# Altium PCB PCB1.PcbDoc
Units mil, origin at the board's own origin, x right, y up, seen from the top; angles counter-clockwise.
Board outline 3655 x 2655 mil, 2 copper layers (Top Layer, Bottom Layer); 40 components, 11 nets, 89 pads, 0 vias.
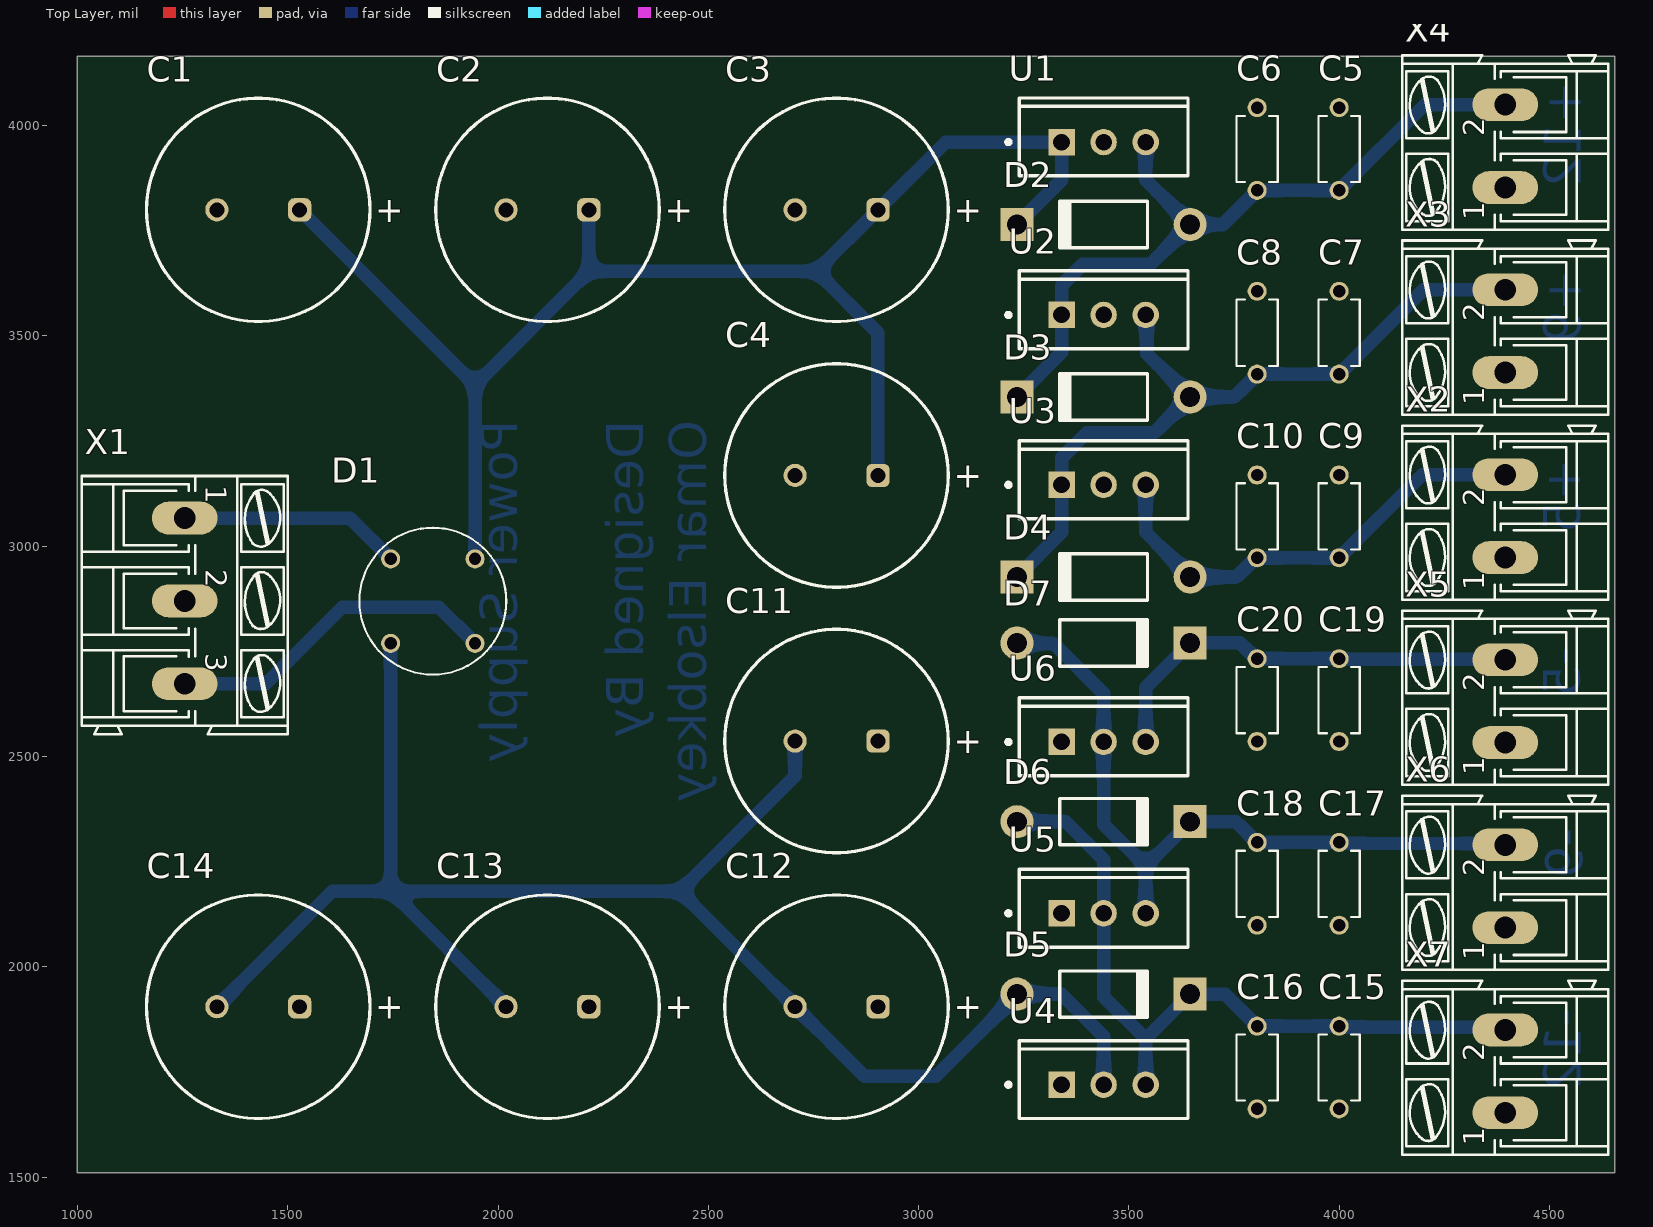
[diagram p0: Top Layer view]
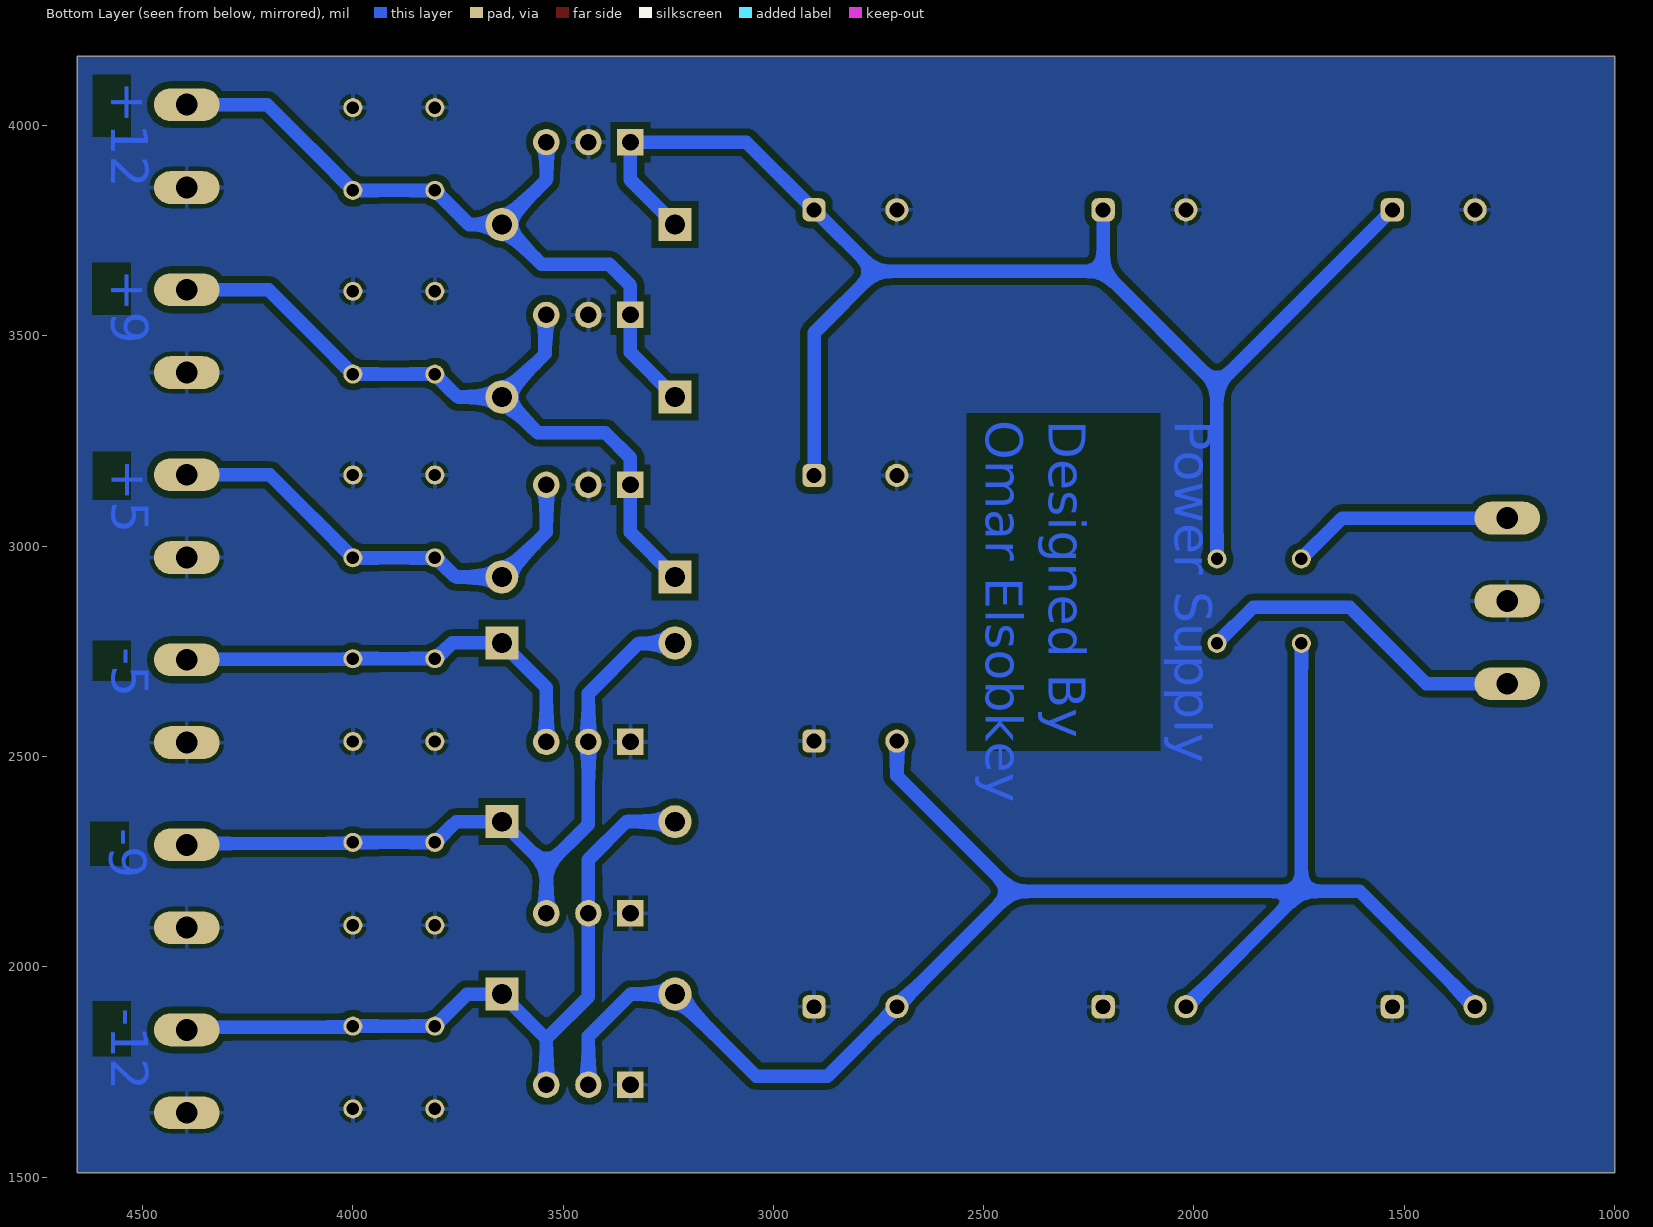
[diagram p1: Bottom Layer view, seen from below]
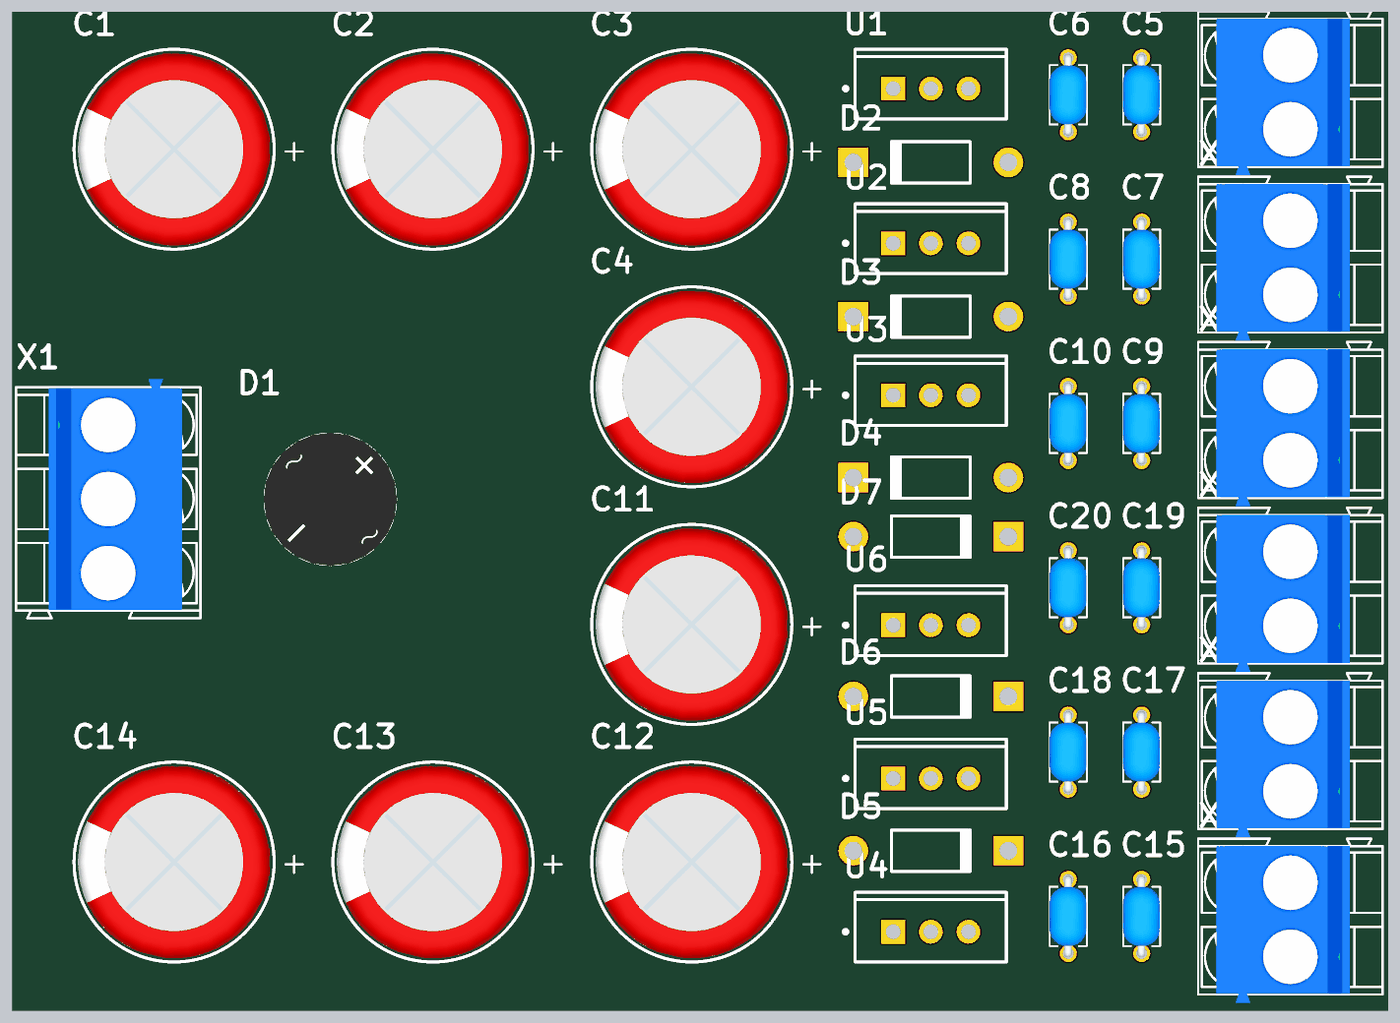
[diagram p2: 3D render of the assembled board from above, using the file's embedded part models]

## Layer stack, top to bottom
Top Solder: solder mask 0.4, Solder Resist, Dk 3.5
Top Layer: signal copper 1.4
Dielectric 1: dielectric 12.6, FR-4, Dk 4.8
Bottom Layer: signal copper 1.4
Bottom Solder: solder mask 0.4, Solder Resist, Dk 3.5

## Board outline
1000,1510 4655,1510 4655,4165 1000,4165

## Design rules (kind name [scope] priority, off if disabled: settings)
Clearance B_GND [InNamedPolygon('B_GND')] p1: gap=16 ignorepadtopadclearanceinfootprint=FALSE
Clearance [All] p2: gap=16 ignorepadtopadclearanceinfootprint=FALSE
PolygonConnect [All] p1: connectstyle=Relief reliefconductorwidth=10 reliefentries=4 polygonreliefangle="90 Angle" airgapwidth=10
RoutingVias [All] p1: holewidth=28 width=50 viastyle="Through Hole" minholewidth=28 minwidth=50 maxholewidth=28 maxwidth=50
SolderMaskExpansion [All] p1: expansion=4 istentingtop=FALSE
UnRoutedNet [All] p1: checkbadconnections=TRUE
Width [All] p1: maxlimit=32 minlimit=32 preferedwidth=32
29 further rules are at their usual default settings.

## Components (designator, comment, footprint, x,y, rotation, side; value= is the part's Value field where it differs from the comment)
C1 "1000uF, 50V" WCAP-ATG8_D13H25 1430,3800 r0 top
C2 "1000uF, 50V" WCAP-ATG8_D13H25 2117.5,3800 r0 top
C3 "1000uF, 50V" WCAP-ATG8_D13H25 2805,3800 r0 top
C4 "1000uF, 50V" WCAP-ATG8_D13H25 2805,3168.33 r0 top
C5 "RDE5C2A220J0M1H03A" CAP_RDE5C2A220J0M1H03A 4000,3944.62 r270 top
C6 "RDE5C2A220J0M1H03A" CAP_RDE5C2A220J0M1H03A 3805,3944.62 r270 top
C7 "RDE5C2A220J0M1H03A" CAP_RDE5C2A220J0M1H03A 4000,3507.77 r270 top
C8 "RDE5C2A220J0M1H03A" CAP_RDE5C2A220J0M1H03A 3805,3507.77 r270 top
C9 "RDE5C2A220J0M1H03A" CAP_RDE5C2A220J0M1H03A 4000,3070.92 r270 top
C10 "RDE5C2A220J0M1H03A" CAP_RDE5C2A220J0M1H03A 3805,3070.92 r270 top
C11 "1000uF, 50V" WCAP-ATG8_D13H25 2805,2536.67 r0 top
C12 "1000uF, 50V" WCAP-ATG8_D13H25 2805,1905 r0 top
C13 "1000uF, 50V" WCAP-ATG8_D13H25 2117.5,1905 r0 top
C14 "1000uF, 50V" WCAP-ATG8_D13H25 1430,1905 r0 top
C15 "RDE5C2A220J0M1H03A" CAP_RDE5C2A220J0M1H03A 4000,1760.38 r270 top
C16 "RDE5C2A220J0M1H03A" CAP_RDE5C2A220J0M1H03A 3805,1760.38 r270 top
C17 "RDE5C2A220J0M1H03A" CAP_RDE5C2A220J0M1H03A 4000,2197.23 r270 top
C18 "RDE5C2A220J0M1H03A" CAP_RDE5C2A220J0M1H03A 3805,2197.23 r270 top
C19 "RDE5C2A220J0M1H03A" CAP_RDE5C2A220J0M1H03A 4000,2634.08 r270 top
C20 "RDE5C2A220J0M1H03A" CAP_RDE5C2A220J0M1H03A 3805,2634.08 r270 top
D1 "2W10G" 2W10G 1845,2869.44 r0 top
D2 "Diode 1N4004" DO-41 3440,3765 r180 top
D3 "Diode 1N4004" DO-41 3440,3355 r180 top
D4 "Diode 1N4004" DO-41 3440,2926.98 r180 top
D5 "Diode 1N4004" DO-41 3440,1935 r0 top
D6 "Diode 1N4004" DO-41 3440,2345 r0 top
D7 "Diode 1N4004" DO-41 3440,2770 r0 top
U1 "LM7812CT" TO-220-P 3440,3961.02 r90 top
U2 "LM7809CT" TO-220-P 3440,3550 r90 top
U3 "LM7805CT" TO-220-P 3440,3145.95 r90 top
U4 "LM7912CT" TO-220-N 3440,1719.57 r90 top
U5 "LM7905CT" TO-220-N 3440,2127.1 r90 top
U6 "LM7909CT" TO-220-N 3440,2534.64 r90 top
X1 "AK300/3" AK300/3 1255,2870 r270 top
X2 "AK300/2" AK300/2 4395,3170 r90 top
X3 "AK300/2" AK300/2 4395,3610 r90 top
X4 "AK300/2" AK300/2 4395,4050 r90 top
X5 "AK300/2" AK300/2 4395,2730 r90 top
X6 "AK300/2" AK300/2 4395,2290 r90 top
X7 "AK300/2" AK300/2 4395,1850 r90 top

## Footprints (in the part's own frame and the unit in brackets; to place one, negate y for a bottom-side part, rotate by r counter-clockwise, add the part's x,y. Pads: shape width x height; smd on the part's side, far side on the other; paste and mask are expansions set on the pad)
2W10G [mm]
  round 1.15 hole 0.75: 1(-2.55,2.55) 2(2.55,2.55) 3(2.55,-2.55) 4(-2.55,-2.55)
  silkscreen extent -4.44,-4.44 4.44,4.44, body extent -6.36,-6.36 6.36,6.36, height 9.65
AK300/2 [mil]
  oval 78x156 hole 52: 1(-197,0) 2(0,0)
  silkscreen extent -297,-245 117,245, body extent -319,-157 98,197, height 496
AK300/3 [mil]
  oval 78x156 hole 52: 1(-197,0) 2(0,0) 3(197,0)
  silkscreen extent -297,-245 317,245, body extent -319,-157 295,197, height 496
CAP_RDE5C2A220J0M1H03A [mm]
  round 1.15 hole 0.75: 1(-2.5,0) 2(2.5,0)
  silkscreen extent -2,-1.25 2,1.25, body extent -2.75,-1.27 2.75,1.23, height 6
DO-41 [mm] "Diode, Axial; Body 5.2 x 2.7 mm (LxDia. max), Lead Dia. 0.86 mm (max)"
  round 2 hole 1.2: 1(-5.23,0)
  rect 2x2 hole 1.2: 2(5.23,0)
  silkscreen extent -2.65,-1.4 2.75,1.4
TO-220-N [mm] "FM, 3-Leads, Body 10.2x4.7mm, Pitch 2.54mm"
  round 1.6 hole 1: 1(0,0) 3(0,-2.54)
  rect 1.6x1.6 hole 1: 2(0,2.54)
  silkscreen extent -2.04,-5.1 2.66,5.87, body extent -2.04,-5.1 2.66,5.1, height 18.95
TO-220-P [mm] "FM, 3-Leads, Body 10.2x4.7mm, Pitch 2.54mm"
  rect 1.6x1.6 hole 1: 1(0,2.54)
  round 1.6 hole 1: 2(0,0) 3(0,-2.54)
  silkscreen extent -2.04,-5.1 2.66,5.87, body extent -2.04,-5.1 2.66,5.1, height 18.95
WCAP-ATG8_D13H25 [mm] "Aluminum Electrolytic Capacitors, 13x25mm"
  rrect50% 1.4x1.4 hole 0.9: 1(2.5,0)
  round 1.4 hole 0.9: 2(-2.5,0)
  silkscreen extent -6.75,-6.75 6.75,6.75, body extent -6.49,-6.5 6.5,6.5, height 25.31

## Part data
C1 C2 C3 C4 C11 C12 C13 C14: library part 860010678024, "WCAP-ATG8 Aluminum Electrolytic Capacitor, Radial, THT, D13xH25, 1000uF, 50V", Capacitance=1000uF, Capacitance Tolerance=+/-20%, Leakage Current=500uA, Manufacturer="Wurth Elektronik", Operating Temperature="-40 to +85degC", Rated Voltage=50VDC, Ripple Current=1485mA, ComponentLink1Description=Manufacturer, ComponentLink1URL=http://www.we-online.de, ComponentLink2Description=Datasheet, ComponentLink2URL=https://www.we-online.com/catalog/datasheet/860010678024.pdf, Diameter=13mm, Dissipation Factor=10%, Endurance=2000h, Height=25mm, Manufacturer Part Number=860010678024, Mounting Technology=THT, Packaging="Ammo Pack", Published Date="October 2020", Technical Reference=ATBI250102M050DSPACB000
C5 C6 C7 C8 C9 C10 C15 C16 C17 C18 C19 C20: "Lead Capacitor C0G_EIA_ with Capacitance: 22pF and Rated Voltage: 100Vdc", Package="Radial Murata", Availability=Unavailable, MF=Murata, MP=RDE5C2A220J0M1H03A, Price=None, SnapEDA_Link=https://www.snapeda.com/parts/RDE5C2A220J0M1H03A/Murata/view-part/4545539/?ref=snap
D2 D3 D4 D5 D6 D7: "1 Amp General Purpose Rectifier", Code_JEDEC=DO-204-AL, ComponentLink1Description="Manufacturer Link", ComponentLink1URL=http://www.fairchildsemi.com/, ComponentLink2Description=Datasheet, ComponentLink2URL=http://www.fairchildsemi.com/ds/1N%2F1N4001.pdf, DatasheetVersion=1998, LatestRevisionDate=17-Jul-2002, LatestRevisionNote="Re-released for DXP Platform.", PackageDescription="Diode, Axial; Body 5.2 x 2.7 mm (LxDia. max), Lead Dia. 0.86 mm (max)", PackageReference=DO-41, PackageVersion=Aug-1999, Published=8-Jun-2000, Publisher="Altium Limited"
U1: library part 7812, Manufacturer=FairchildSemiconductor, Maximum Input Voltage=35V, Maximum Output Current=2.2(Typ)A, Maximum Quiescent Current=8mA, Operating Temperature=-40to125degC, Output Voltage=5V, Package=3TO-220AB, Package Description="3-Pin Through Hole Device, Body 10 x 4.5 mm, Pitch 2.54 mm", Package Reference=TO-220, Typical Dropout Voltage @ Current=2@1AV, Accuracy=±4%, Category=LinearRegulator, Datasheet URL=https://datasheet.ciiva.com/26904/lm7805ct-26904988.pdf, Datasheet Version=Aug-12, Line Regulation=100mV, Load Regulation=100mV, Manufacturer URL=https://www.fairchildsemi.com/, Mounting=ThroughHole, Number of Outputs=1, Output Type=Fixed, Package URL=https://www.fairchildsemi.com/package-drawings/TO/TO220B03.pdf, Packaging=Rail/Tube, Polarity=Positive, Rad Hard=No, Type=Linear
U2: library part 7809, Manufacturer=FairchildSemiconductor, Maximum Input Voltage=35V, Maximum Output Current=2.2(Typ)A, Maximum Quiescent Current=8mA, Operating Temperature=-40to125degC, Output Voltage=5V, Package=3TO-220AB, Package Description="3-Pin Through Hole Device, Body 10 x 4.5 mm, Pitch 2.54 mm", Package Reference=TO-220, Typical Dropout Voltage @ Current=2@1AV, Accuracy=±4%, Category=LinearRegulator, Datasheet URL=https://datasheet.ciiva.com/26904/lm7805ct-26904988.pdf, Datasheet Version=Aug-12, Line Regulation=100mV, Load Regulation=100mV, Manufacturer URL=https://www.fairchildsemi.com/, Mounting=ThroughHole, Number of Outputs=1, Output Type=Fixed, Package URL=https://www.fairchildsemi.com/package-drawings/TO/TO220B03.pdf, Packaging=Rail/Tube, Polarity=Positive, Rad Hard=No, Type=Linear
U3: library part 7805, "Positive Voltage Regulator, 5 V, 1 A, -40 to 125 degC, 3-Pin TO-220, RoHS, Tube", Manufacturer=FairchildSemiconductor, Maximum Input Voltage=35V, Maximum Output Current=2.2(Typ)A, Maximum Quiescent Current=8mA, Operating Temperature=-40to125degC, Output Voltage=5V, Package=3TO-220AB, Package Description="3-Pin Through Hole Device, Body 10 x 4.5 mm, Pitch 2.54 mm", Package Reference=TO-220, Typical Dropout Voltage @ Current=2@1AV, Accuracy=±4%, Category=LinearRegulator, Datasheet URL=https://datasheet.ciiva.com/26904/lm7805ct-26904988.pdf, Datasheet Version=Aug-12, Line Regulation=100mV, Load Regulation=100mV, Manufacturer URL=https://www.fairchildsemi.com/, Mounting=ThroughHole, Number of Outputs=1, Output Type=Fixed, Package URL=https://www.fairchildsemi.com/package-drawings/TO/TO220B03.pdf, Packaging=Rail/Tube, Polarity=Positive, Rad Hard=No, Type=Linear
U4: library part 7912, Manufacturer=FairchildSemiconductor, Maximum Input Voltage=35V, Maximum Output Current=2.2(Typ)A, Maximum Quiescent Current=8mA, Operating Temperature=-40to125degC, Output Voltage=5V, Package=3TO-220AB, Package Description="3-Pin Through Hole Device, Body 10 x 4.5 mm, Pitch 2.54 mm", Package Reference=TO-220, Typical Dropout Voltage @ Current=2@1AV, Accuracy=±4%, Category=LinearRegulator, Datasheet URL=https://datasheet.ciiva.com/26904/lm7805ct-26904988.pdf, Datasheet Version=Aug-12, Line Regulation=100mV, Load Regulation=100mV, Manufacturer URL=https://www.fairchildsemi.com/, Mounting=ThroughHole, Number of Outputs=1, Output Type=Fixed, Package URL=https://www.fairchildsemi.com/package-drawings/TO/TO220B03.pdf, Packaging=Rail/Tube, Polarity=Positive, Rad Hard=No, Type=Linear
U5: library part 7905, "Negative Voltage Regulator, 5 V, 1 A, -40 to 125 degC, 3-Pin TO-220, RoHS, Tube", Manufacturer=FairchildSemiconductor, Maximum Input Voltage=35V, Maximum Output Current=2.2(Typ)A, Maximum Quiescent Current=8mA, Operating Temperature=-40to125degC, Output Voltage=5V, Package=3TO-220AB, Package Description="3-Pin Through Hole Device, Body 10 x 4.5 mm, Pitch 2.54 mm", Package Reference=TO-220, Typical Dropout Voltage @ Current=2@1AV, Accuracy=±4%, Category=LinearRegulator, Datasheet URL=https://datasheet.ciiva.com/26904/lm7805ct-26904988.pdf, Datasheet Version=Aug-12, Line Regulation=100mV, Load Regulation=100mV, Manufacturer URL=https://www.fairchildsemi.com/, Mounting=ThroughHole, Number of Outputs=1, Output Type=Fixed, Package URL=https://www.fairchildsemi.com/package-drawings/TO/TO220B03.pdf, Packaging=Rail/Tube, Polarity=Positive, Rad Hard=No, Type=Linear
U6: library part 7909, Manufacturer=FairchildSemiconductor, Maximum Input Voltage=35V, Maximum Output Current=2.2(Typ)A, Maximum Quiescent Current=8mA, Operating Temperature=-40to125degC, Output Voltage=5V, Package=3TO-220AB, Package Description="3-Pin Through Hole Device, Body 10 x 4.5 mm, Pitch 2.54 mm", Package Reference=TO-220, Typical Dropout Voltage @ Current=2@1AV, Accuracy=±4%, Category=LinearRegulator, Datasheet URL=https://datasheet.ciiva.com/26904/lm7805ct-26904988.pdf, Datasheet Version=Aug-12, Line Regulation=100mV, Load Regulation=100mV, Manufacturer URL=https://www.fairchildsemi.com/, Mounting=ThroughHole, Number of Outputs=1, Output Type=Fixed, Package URL=https://www.fairchildsemi.com/package-drawings/TO/TO220B03.pdf, Packaging=Rail/Tube, Polarity=Positive, Rad Hard=No, Type=Linear
X1 X2 X3 X4 X5 X6 X7: Package=None, Availability=Unavailable, Check_prices=https://www.snapeda.com/parts/AK300/3/Altech/view-part/2748485/?ref=eda, MF=Altech, MP=AK300/3, Price=None, SnapEDA_Link=https://www.snapeda.com/parts/AK300/3/Altech/view-part/2748485/?ref=snap

## Nets (pads, with @x,y where several pads share a name; then routed paths per layer and width w, separated by ;. In a path a pad name is that pad's centre, name@x,y a point inside that pad or via, vN(x,y) a via of type N, cw(c..) or ccw(c..) an arc to the next point about the centre after c; other vN are vias at no path point)
+5: C9.2 C10.2 D4.1 U3.3 X2.2 | length 1112.6
  Bottom Layer w32: U3.3 3540,3032.89 D4.1 3755.89,2926.98 3801.41,2972.5 C10.2 C9.2 4197.5,3170 X2.2
+9: C7.2 C8.2 D3.1 D4.2 U2.3 U3.1 X3.2 | length 1786.4
  Bottom Layer w32: D4.2 3340,3032.89 U3.1 3340,3210 3400,3270 3560.91,3270 D3.1 ; U2.3 3543.05,3546.95 3543.05,3457.86 D3.1 ; X3.2 4200.65,3610 C7.2 C8.2 3750.65,3355 D3.1
+12: C5.2 C6.2 D2.1 D3.2 U1.3 U2.1 X4.2 | length 1781.9
  Bottom Layer w32: D3.2 3340,3460.91 U2.1 3340,3620 3390,3670 3550.91,3670 D2.1 ; U1.3 3540,3870.91 D2.1 ; X4.2 4203.8,4050 C5.2 C6.2 3723.8,3765 D2.1
+V: C1.1 C2.1 C3.1 C4.1 D1.2 D2.2 U1.1 | length 3569.1
  Bottom Layer w32: C1.1 1945.39,3383.03 ; D1.2 1945.39,3383.03 ; C2.1 2215.93,3653.56 ; C4.1 2903.43,3507.13 2756.99,3653.56 ; D2.2 3340,3870.91 U1.1 3064.45,3961.02 C3.1 2756.99,3653.56 ; 1945.39,3383.03 2215.93,3653.56 ; 2215.93,3653.56 2756.99,3653.56
-5: C19.1 C20.1 D7.2 U6.3 X5.2 | length 1044.9
  Bottom Layer w32: U6.3 3540,2664.09 D7.2 3763.91,2770 3801.41,2732.5 C20.1 C19.1 4001.25,2731.25 4393.75,2731.25 X5.2
-9: C17.1 C18.1 D6.2 D7.1 U5.3 U6.1 X6.2 | length 1741.6
  Bottom Layer w32: D7.1 3235.56,2768.54 3321.46,2768.54 3440,2650 U6.1 3440,2339.09 3540,2239.09 ; U5.3 3540,2239.09 ; X6.2 4391.89,2293.11 4002.54,2293.11 C17.1 C18.1 3803.8,2295.65 3754.45,2345 D6.2 3540,2239.09
-12: C15.1 C16.1 D5.2 D6.1 U4.3 U5.1 X7.2 | length 1754.1
  Bottom Layer w32: D6.1 3350,2345 3440,2255 U5.1 3440,1929.09 3540,1829.09 ; U4.3 3540,1829.09 ; X7.2 4388.74,1856.26 4002.54,1856.26 C15.1 C16.1 3728.8,1935 D5.2 3540,1829.09
-V: C11.2 C12.2 C13.2 C14.2 D1.4 D5.1 U4.1 | length 4091.7
  Bottom Layer w32: C14.2 1606.04,2179.47 1744.61,2179.47 ; D1.4 1744.61,2179.47 ; C13.2 1744.61,2179.47 ; C11.2 2706.57,2453.94 2432.11,2179.47 ; U4.1 3440,1835 3340,1935 D5.1 3234.09,1932.84 3041.25,1740 2871.57,1740 C12.2 2432.11,2179.47 ; 1744.61,2179.47 2432.11,2179.47
GND: C1.2 C2.2 C3.2 C4.2 C5.1 C6.1 C7.1 C8.1 C9.1 C10.1 C11.1 C12.1 C13.1 C14.1 C15.2 C16.2 C17.2 C18.2 C19.2 C20.2 U1.2 U2.2 U3.2 U4.2 U5.2 U6.2 X1.2 X2.1 X3.1 X4.1 X5.1 X6.1 X7.1
NetD1_1: D1.1 X1.1 | length 529.9
  Bottom Layer w32: X1.1 1647.44,3067 D1.1
NetD1_3: D1.3 X1.3 | length 801.4
  Bottom Layer w32: X1.3 1448,2673 1630,2855 1859.44,2855 D1.3

## Polygon pours and split planes (outlines as drawn)
GND on Bottom Layer "B_GND" (solid, remove dead copper, pour order 0): 1000,1510 4655,1510 4655,4165 1000,4165

## Other copper
Bottom Layer:
  text "+12" at 4603.23,4105.53 h150 r90
  text "+9" at 4602.79,3658.23 h150 r90
  text "Power Supply /  / Designed By / Omar Elsobkey" at 2523.95,3299.88 h150 r90
  text "+5" at 4602.35,3208.4 h150 r90
  text "-5" at 4602.35,2759.25 h150 r90
  text "-9" at 4607.79,2329.08 h150 r90
  text "-12" at 4603.23,1901.38 h150 r90

## Text inside footprints (layer, text, board x,y; h text height)
C1: Top Overlay "+" at 1708.54,3770.98 h59.06
C2: Top Overlay "+" at 2396.04,3770.98 h59.06
C3: Top Overlay "+" at 3083.54,3770.98 h59.06
C4: Top Overlay "+" at 3083.54,3139.32 h59.06
C11: Top Overlay "+" at 3083.54,2507.65 h59.06
C12: Top Overlay "+" at 3083.54,1875.98 h59.06
C13: Top Overlay "+" at 2396.04,1875.98 h59.06
C14: Top Overlay "+" at 1708.54,1875.98 h59.06
X1: Top Overlay "2" at 1305,2945 h50 r270; Top Overlay "1" at 1305,3145 h50 r270; Top Overlay "3" at 1305,2745 h50 r270
X2: Top Overlay "1" at 4345,2895 h50 r90; Top Overlay "2" at 4345,3095 h50 r90
X3: Top Overlay "1" at 4345,3335 h50 r90; Top Overlay "2" at 4345,3535 h50 r90
X4: Top Overlay "1" at 4345,3775 h50 r90; Top Overlay "2" at 4345,3975 h50 r90
X5: Top Overlay "1" at 4345,2455 h50 r90; Top Overlay "2" at 4345,2655 h50 r90
X6: Top Overlay "1" at 4345,2015 h50 r90; Top Overlay "2" at 4345,2215 h50 r90
X7: Top Overlay "1" at 4345,1575 h50 r90; Top Overlay "2" at 4345,1775 h50 r90